# Altium PCB Simple Oscillator using NE555 Timer IC.PcbDoc
Units mil, origin at the board's own origin, x right, y up, seen from the top; angles counter-clockwise.
Board outline 1080 x 850 mil, 2 copper layers (Top Layer, Bottom Layer); 9 components, 8 nets, 28 pads, 0 vias.
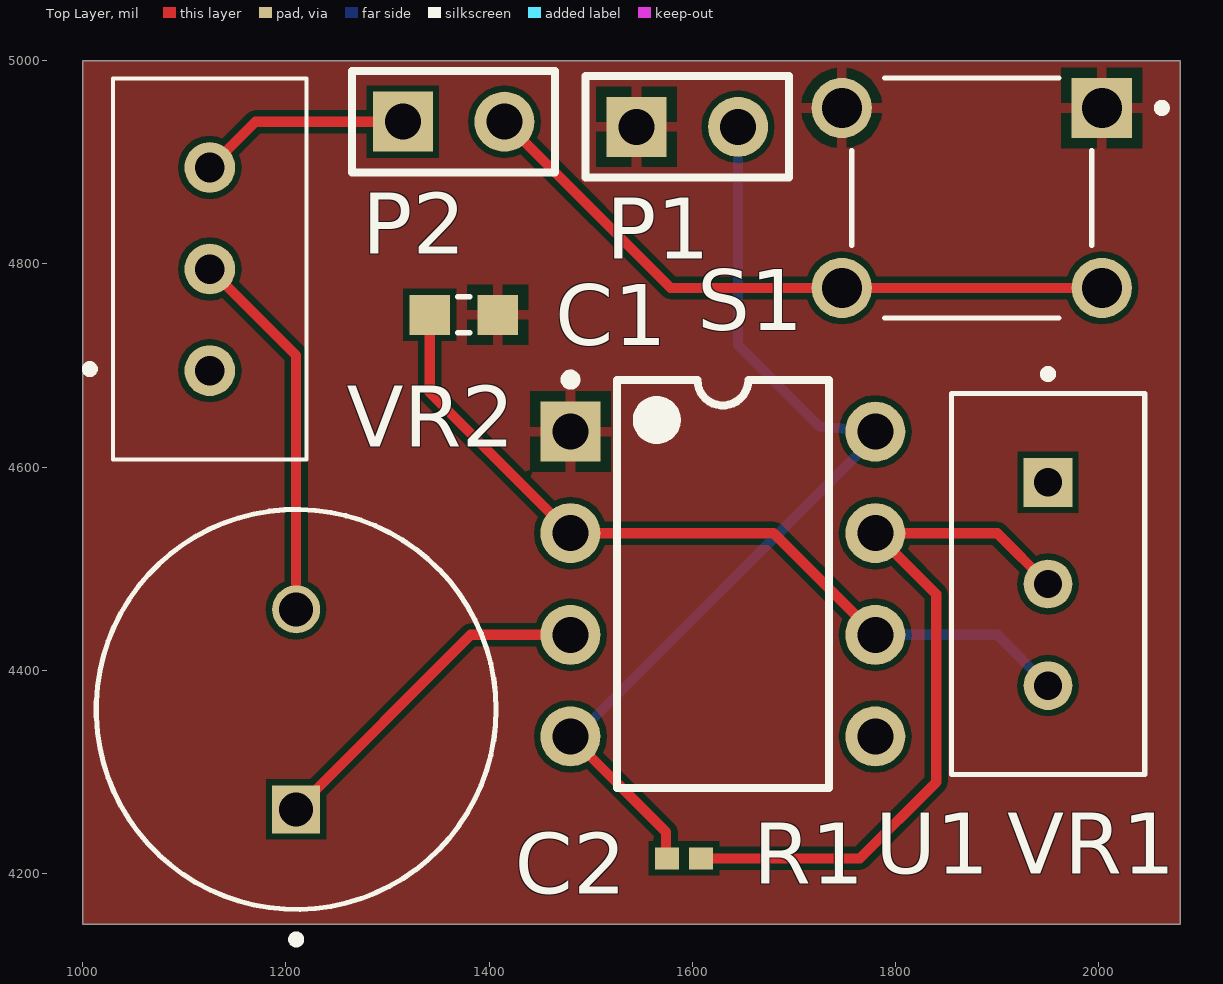
[diagram p0: Top Layer view]
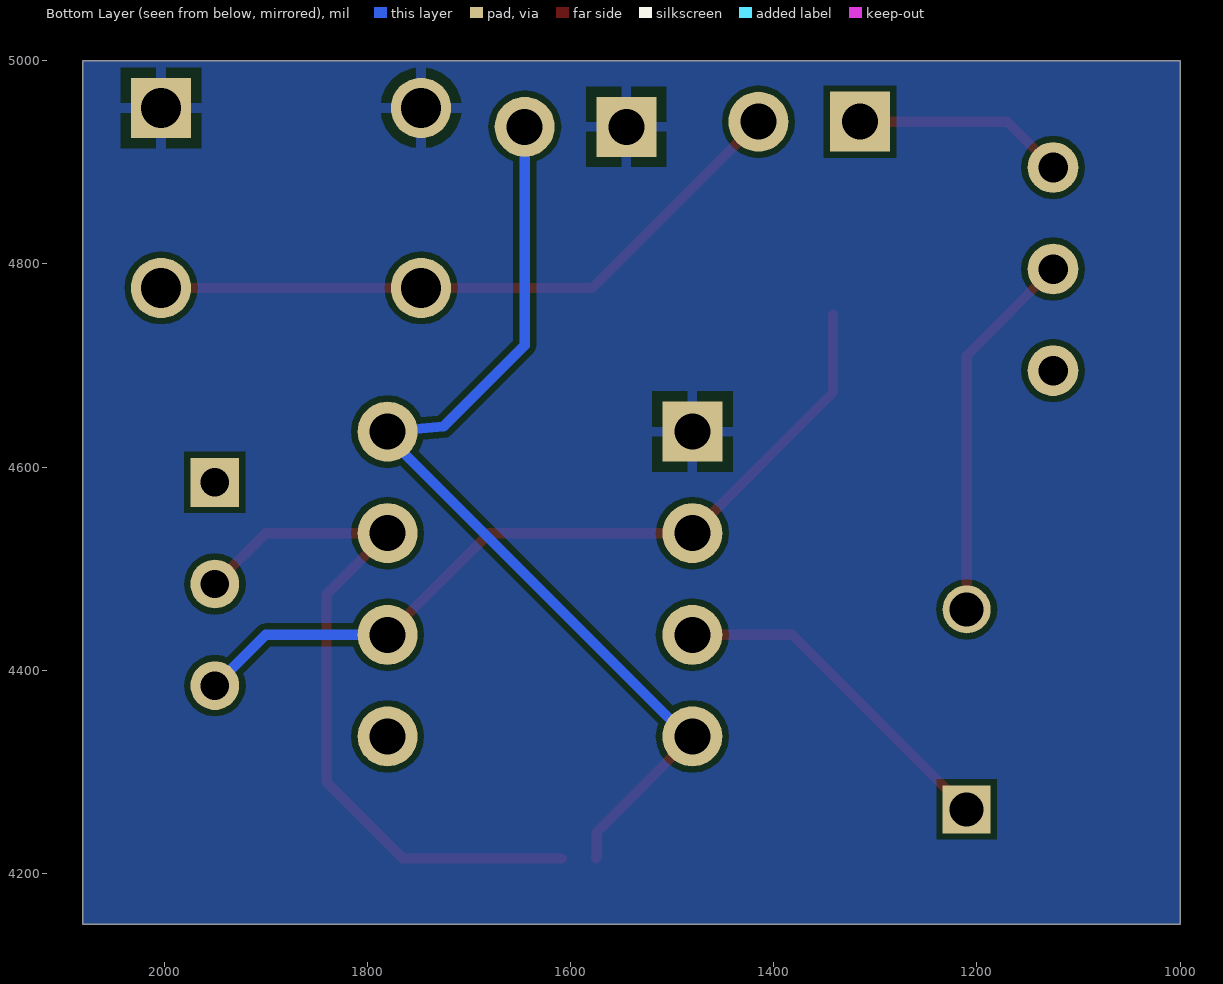
[diagram p1: Bottom Layer view, seen from below]
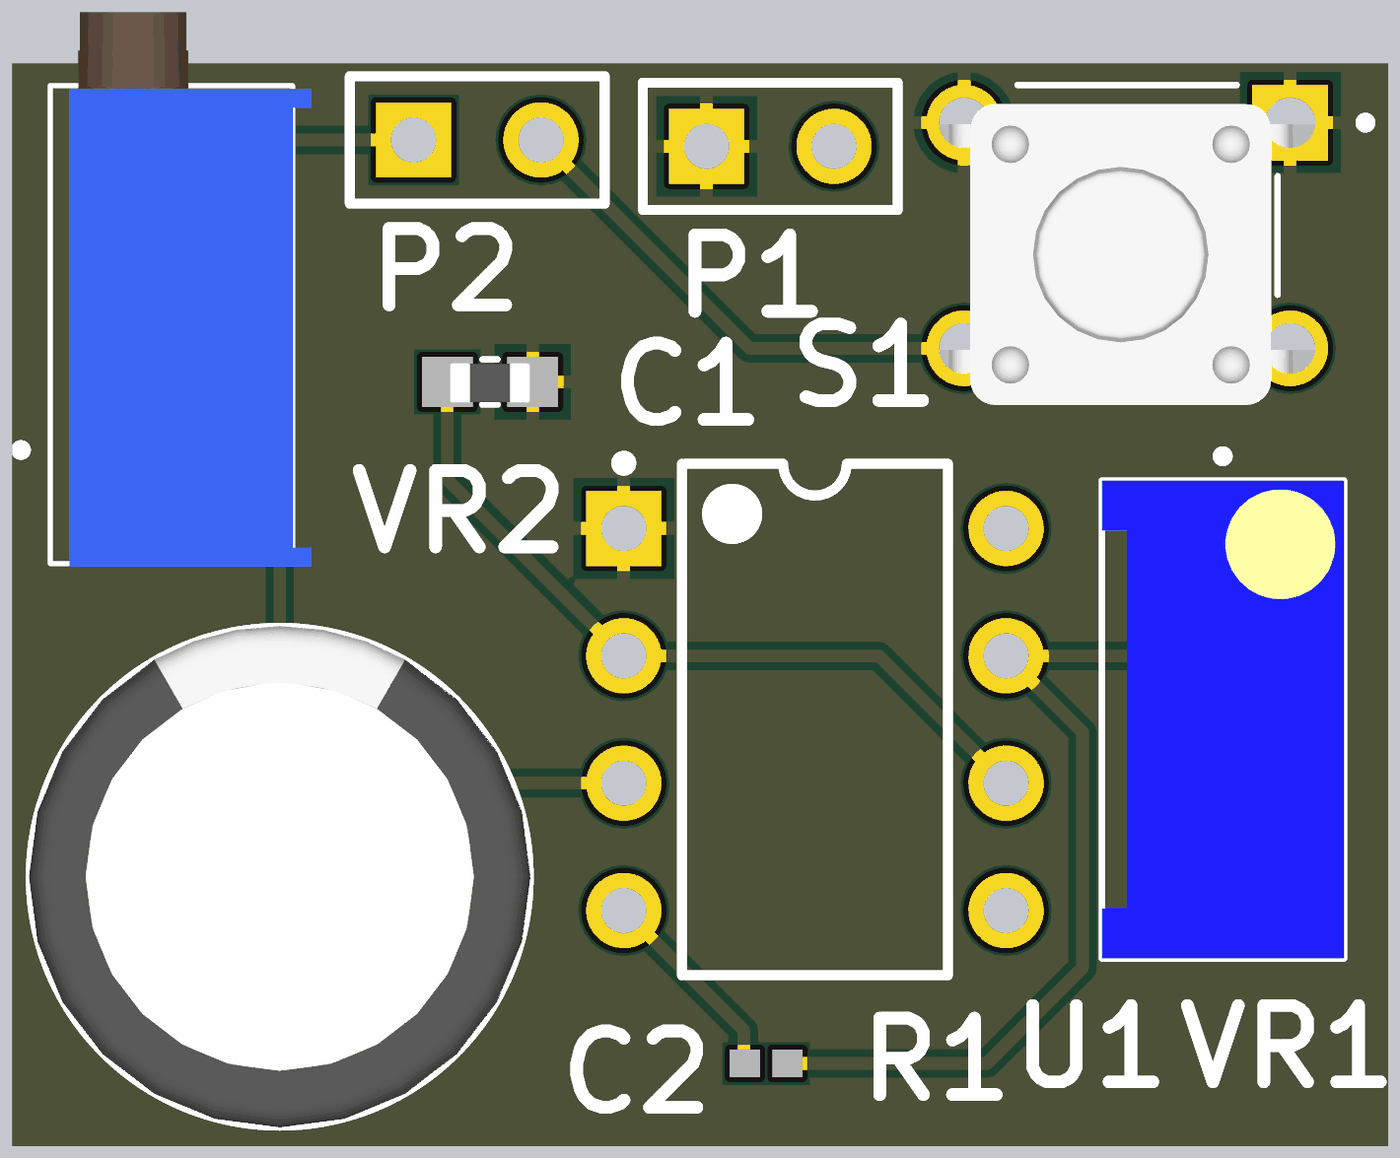
[diagram p2: 3D render of the assembled board from above, using the file's embedded part models]

## Layer stack, top to bottom
Top Solder: solder mask 0.4, Solder Resist, Dk 3.5
Top Layer: signal copper 1.4
Dielectric 1: dielectric 12.6, FR-4, Dk 4.8
Bottom Layer: signal copper 1.4
Bottom Solder: solder mask 0.4, Solder Resist, Dk 3.5

## Board outline
1000,4150 2080,4150 2080,5000 1000,5000

## Design rules (kind name [scope] priority, off if disabled: settings)
Clearance [All] p1: gap=5.98 ignorepadtopadclearanceinfootprint=FALSE
MinimumSolderMaskSliver [All] p1: minsoldermaskwidth=0.98
PolygonConnect [All] p1: connectstyle=Relief reliefconductorwidth=10 reliefentries=4 polygonreliefangle="90 Angle" airgapwidth=10
RoutingVias [All] p1: holewidth=28 width=50 viastyle="Through Hole" minholewidth=28 minwidth=50 maxholewidth=28 maxwidth=50
SilkToSolderMaskClearance [IsPad] p1: minsilkscreentomaskgap=5 clearancetoexposedcopper=TRUE
SolderMaskExpansion [All] p1: expansion=4
Width [All] p1: maxlimit=12.01 minlimit=5.98 preferedwidth=10
28 further rules are at their usual default settings.

## Components (designator, comment, footprint, x,y, rotation, side; value= is the part's Value field where it differs from the comment)
C1 "20nF" CC0603KRX7R9BB203 1375,4750 r0 top
C2 "25uF" EEUED2C250U 1210,4361.57 r90 top
P1 "9V/12V Battery Con" HDR1X2 1545,4935 r0 top
P2 "Speaker Con" HDR1X2 1315,4940 r0 top
R1 "22kΩ" RESC1005X40X25NL05T10 1591.73,4215 r180 top value=22kO
S1 "TL1105AF160Q" TL1105AF160Q 1875,4865 r180 top
U1 "NE555P" P0008A 1630,4485 r0 top
VR1 "100kΩ" 3296W-1-104 1950,4485 r270 top value=100kO
VR2 "10kΩ" 3296X-1-103 1125,4795 r0 top value=10kO

## Footprints (in the part's own frame and the unit in brackets; to place one, negate y for a bottom-side part, rotate by r counter-clockwise, add the part's x,y. Pads: shape width x height; smd on the part's side, far side on the other; paste and mask are expansions set on the pad)
3296W-1-104 [mm]
  rect 1.218x1.218 hole 0.71: 1(-2.54,0)
  round 1.218 hole 0.71: 2(0,0) 3(2.54,0)
  silkscreen extent -5.35,-2.41 4.76,2.42, body extent -4.76,-2.41 4.76,2.42, height 11.55
3296X-1-103 [mm]
  round 1.269 hole 0.74: 1(0,-2.54) 2(0,0) 3(0,2.54)
  silkscreen extent -3.1,-4.76 2.41,4.76, body extent -2.03,-4.83 2.8,6.22, height 10.03
CC0603KRX7R9BB203 [mm]
  rect 1.016x1 smd: 1(-0.85,0) 2(0.85,0)
  silkscreen extent -0.15,-0.45 0.15,0.45, body extent -0.8,-0.42 0.8,0.38, height 0.9
EEUED2C250U [mm]
  round 1.2 hole 0.85: N(2.5,0)
  rect 1.2x1.2 / inner round 1.2 / far side rect 1.2x1.2 hole 0.85: P(-2.5,0)
  silkscreen extent -5.85,-5 5,5, body extent -5,-5 5,5, height 16
HDR1X2 [mm] "Connector; Header; 2 Position"
  rect 1.5x1.5 hole 0.9: 1(0,0)
  round 1.5 hole 0.9: 2(2.54,0)
  silkscreen extent -1.27,-1.27 3.81,1.27
P0008A [mm] "DIP, 8-Leads, Body 10.15x6.6mm, Pitch 2.54mm"
  rect 1.5x1.5 hole 0.9: 1(-3.81,3.81)
  round 1.5 hole 0.9: 2(-3.81,1.27) 3(-3.81,-1.27) 4(-3.81,-3.81) 5(3.81,-3.81) 6(3.81,-1.27) 7(3.81,1.27) 8(3.81,3.81)
  silkscreen extent -3.93,-5.1 2.65,5.23, body extent -3.95,-5.07 3.95,5.07, height 5.08
RESC1005X40X25NL05T10 [mm] "Chip Resistor, 2-Leads, Body 1.00x0.50mm, IPC Medium Density"
  rect 0.6x0.55 smd: 1(-0.425,0) 2(0.425,0)
  body extent -0.53,-0.27 0.53,0.28, height 0.4
TL1105AF160Q [mm]
  rect 1.508x1.508 / inner round 1.508 / far side rect 1.508x1.508 hole 1: 1(-3.25,-2.25)
  round 1.508 hole 1: 2(3.25,-2.25) 3(-3.25,2.25) 4(3.25,2.25)
  silkscreen extent -4.85,-3 3,3, body extent -3.82,-2.62 4.07,3.38, height 3.21

## Part data
C1: library part CC0603KRX7R9BB203, "X7R 20nF 50V 0603 Multilayer Ceramic Capacitors MLCC - SMD/SMT ROHS", LCSC Part#=C282065, Manufacturer=YAGEO, Package=0603, Datasheet=https://datasheet.lcsc.com/lcsc/1811082015_YAGEO-CC0603KRX7R9BB203_C282065.pdf, Mfr.Part #=CC0603KRX7R9BB203, Packaging="Tape & Reel (TR)"
C2: library part EEUED2C250U, "Aluminum Electrolytic Capacitors, ED-A Series, 25uF +/- 20%, 160V, Radial lead type(10x16mm)", Manufacturer=Panasonic, Package="RADIAL-2 Panasonic", Mfr.Part #=EEUED2C250U
P1 P2: library part "Header 2", "Header, 2-Pin", LatestRevisionDate=17-Jul-2002, LatestRevisionNote="Re-released for DXP Platform.", Publisher="Altium Limited"
R1: library part CMP-2002-07517-1, "22kO 50V Thick Film Resistors 62.5mW ±1% -55?~+155? ±100ppm/? 0402 Chip Resistor - Surface Mount ROHS", LCSC Part#=C82868, Manufacturer=YAGEO, Mfr.Part #=RC0402FR-0722KL, Package=0402, Datasheet=https://datasheet.lcsc.com/lcsc/1809181725_YAGEO-RC0402FR-0722KL_C82868.pdf, Packaging="Tape & Reel (TR)"
S1: "6mm 1.4mm Round Button 50mA Straight 6mm SPST 12V Plugin,6x6mm Tactile Switches ROHS", LCSC Part#=C273465, Manufacturer=E-Switch, Package=Plugin,6x6mm, Datasheet=https://datasheet.lcsc.com/lcsc/1809291031_E-Switch-TL1105AF160Q_C273465.pdf, Mfr.Part #=TL1105AF160Q
U1: library part CMP-2000-04954-1, "4.5V~16V 0?~+70? 10mA DIP-8 Timers / Clock Oscillators ROHS", LCSC Part#=C46749, Manufacturer="Texas Instruments", Package=DIP-8, Datasheet=https://datasheet.lcsc.com/lcsc/1809042012_Texas-Instruments-NE555P_C46749.pdf, Mfr.Part #=NE555P, Packaging=Tube-packed
VR1: library part 3296W-1-104, "±10% 100kO Plugin Variable Resistors/Potentiometers ROHS", LCSC Part#=C330435, Manufacturer="BOCHEN(Chengdu Guosheng Tech)", Package=Plugin, Datasheet=https://datasheet.lcsc.com/lcsc/1912111437_BOCHEN-Chengdu-Guosheng-Tech-3296W-1-104_C330435.pdf, Mfr.Part #=3296W-1-104, Packaging=Bag-packed
VR2: library part 3296X-1-103, "±10% 10kO Plugin Variable Resistors/Potentiometers ROHS", LCSC Part #=C118955, Manufacturer="BOCHEN(Chengdu Guosheng Tech)", Package=Plugin, Datasheet=https://datasheet.lcsc.com/lcsc/1811011704_BOCHEN-Chengdu-Guosheng-Tech-3296X-1-103_C118955.pdf, Mfr. Part #=3296X-1-103

## Nets (pads, with @x,y where several pads share a name; then routed paths per layer and width w, separated by ;. In a path a pad name is that pad's centre, name@x,y a point inside that pad or via, vN(x,y) a via of type N, cw(c..) or ccw(c..) an arc to the next point about the centre after c; other vN are vias at no path point)
GND: C1.2 P1.1 S1.1 S1.2 U1.1
NetC1_1: C1.1 U1.2 U1.6 VR1.3 | length 804.5
  Top Layer w10: C1.1 1341.54,4673.46 U1.2 1680,4535 U1.6
  Bottom Layer w10: U1.6 1900,4435 VR1.3
NetC2_N: C2.N VR2.2 | length 370.2
  Top Layer w10: VR2.2 1210,4710 C2.N
NetC2_P: C2.P U1.3 | length 341.2
  Top Layer w10: C2.P 1381.85,4435 U1.3
NetP1_2: P1.2 R1.2 U1.4 U1.8 | length 971.5
  Top Layer w10: U1.4 1574.17,4240.83 1574.17,4215.83 R1.2
  Bottom Layer w10: U1.4@1480,4330 1780,4630 1779.55,4634.96 1725.09,4639.91 1645,4720 P1.2
NetP2_1: P2.1 VR2.3 | length 208.6
  Top Layer w10: VR2.3 1170,4940 P2.1
NetP2_2: P2.2 S1.3 S1.4 | length 655.7
  Top Layer w10: P2.2 1578.58,4776.42 S1.4 S1.3
NetR1_1: R1.1 U1.7 VR1.2 | length 723.2
  Top Layer w10: R1.1 1765,4215 1840,4290 1840,4475 U1.7 1900,4535 VR1.2
pads on no net: U1.5 VR1.1 VR2.1

## Polygon pours and split planes (outlines as drawn)
GND on Bottom Layer "GND_L02_P002" (solid, pour order 2): 1000,4150 2080,4150 2080,5000 1000,5000
GND on Top Layer "GND_L01_P003" (solid, pour order 3): 1000,4150 2080,4150 2080,5000 1000,5000

## Silkscreen, mask and mechanical layers (free items; w line width, h text height)
Mechanical 1:
  the board outline again, w10